# EAGLE board carret_actuator (EAGLE 5.11)
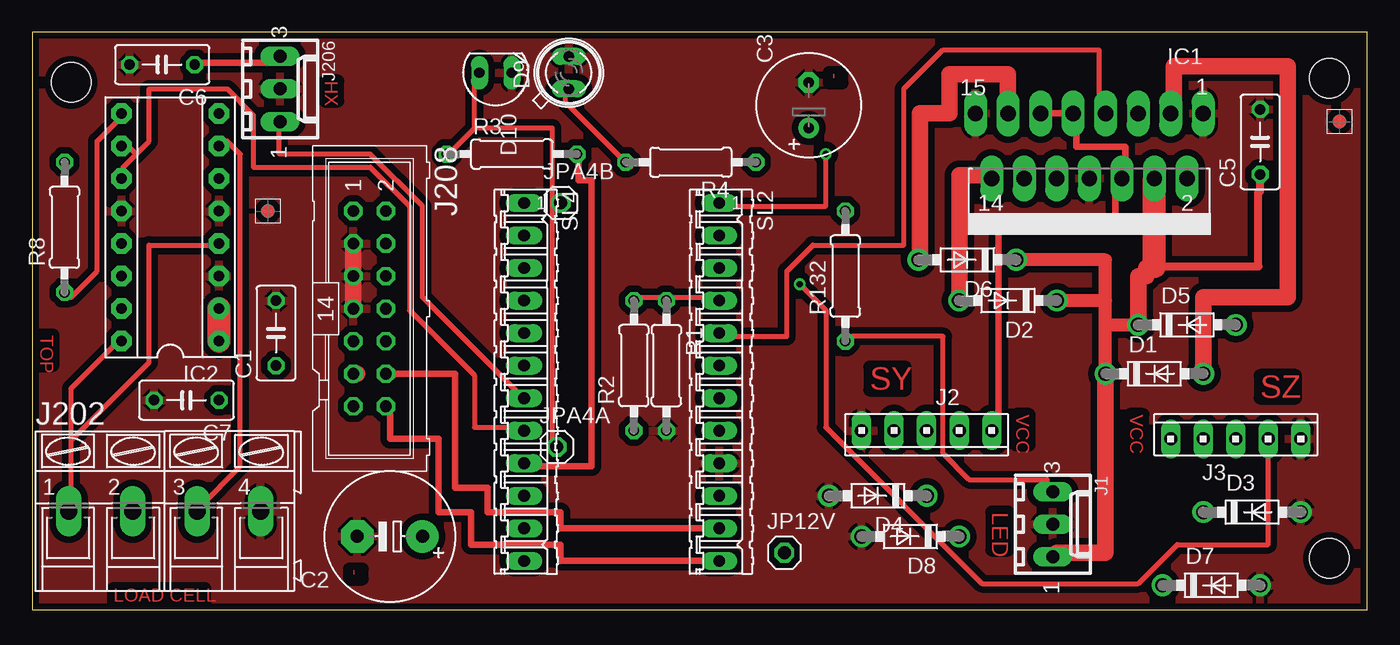
[diagram p0: board, top side]
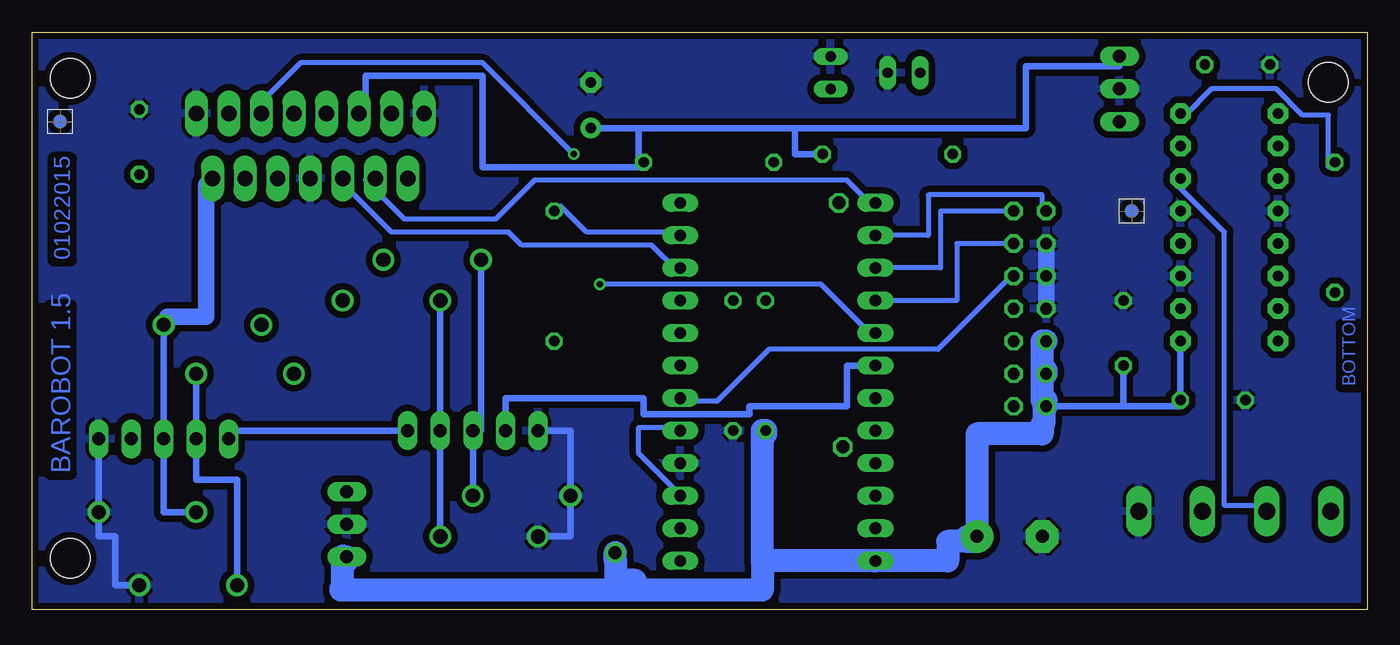
[diagram p1: board, bottom side, seen from below]

Size 104.27 x 45.09 mm. Coordinates in mm from the lower left corner, seen from the top.
Outline: 0,0 104.27,0 104.27,45.09 0,45.09 0,0
Copper layers (1*16): Top 0.035mm / dielectric 1.5mm / Bottom 0.035mm
Design rules "default *": minimum track width 10mil, minimum drill 0.5mm, track to track 10mil, track to pad 10mil, pad to pad 8mil, via to via 10mil, smd to smd 8mil, copper to edge 20mil, drill to drill 8mil, minimum pad ring 10mil, minimum via ring 8mil, stop-mask expansion 0mil, vias tented up to drill 0mil, thermal gap 10mil
Net classes: 0 default: width 0.381 mm, drill 0.254 mm, clearance 0.254 mm; 1 power12: width 1.778 mm; 2 ground: width 0.508 mm; 3 power5: width 0.508 mm; 4 power6: width 1.27 mm
Holes 3.1 mm at 101.3,41.47 3.05,41.15 101.3,4
vRestrict: area 20.3,32.4 to 58.4,45.1

## Footprints (pad centres in the part's own frame; a part is rotated, then mirrored left to right if it is on the bottom)
C050-030X075 = drill 0.813 octagon: 1 -2.54,0; 2 2.54,0
E5-10,5 = drill 1.016 pad 2.54 round: + -2.54,0 | drill 1.016 pad 2.54 octagon: - 2.54,0
E3,5-8 = drill 0.813 pad 1.6 round: + -1.778,0 | drill 0.813 pad 1.6 octagon: - 1.778,0
DO41-7.6 = drill 1.1 pad 1.7 round: A 3.81,0; C -3.81,0
SFH482 = drill 0.813 long: A -1.27,0; K 1.27,0
SFH205 = drill 0.813 long: A 0,-1.27; K 0,1.27
MULTIWATT-15 = drill 1.2 long: 1 -8.89,-7.62; 2 -7.62,-2.54; 3 -6.35,-7.62; 4 -5.08,-2.54; 5 -3.81,-7.62; 6 -2.54,-2.54; 7 -1.27,-7.62; 8 0,-2.54; 9 1.27,-7.62; 10 2.54,-2.54; 11 3.81,-7.62; 12 5.08,-2.54; 13 6.35,-7.62; 14 7.62,-2.54; 15 8.89,-7.62
DIL16 = drill 0.813 pad 1.6 octagon: 1 -8.89,-3.81; 2 -6.35,-3.81; 3 -3.81,-3.81; 4 -1.27,-3.81; 5 1.27,-3.81; 6 3.81,-3.81; 7 6.35,-3.81; 8 8.89,-3.81; 9 8.89,3.81; 10 6.35,3.81; 11 3.81,3.81; 12 1.27,3.81; 13 -1.27,3.81; 14 -3.81,3.81; 15 -6.35,3.81; 16 -8.89,3.81
6410-03 = drill 1.016 long: 1 2.54,0; 2 0,0; 3 -2.54,0
10X05MTA = drill 1.016 long: 1 5.08,0; 2 2.54,0; 3 0,0; 4 -2.54,0; 5 -5.08,0
AK300/4 = drill 1.321 long: 1 -7.493,0; 2 -2.515,0; 3 2.515,0; 4 7.493,0
ML14 = drill 0.914 octagon: 1 -7.62,-1.27; 2 -7.62,1.27; 3 -5.08,-1.27; 4 -5.08,1.27; 5 -2.54,-1.27; 6 -2.54,1.27; 7 0,-1.27; 8 0,1.27; 9 2.54,-1.27; 10 2.54,1.27; 11 5.08,-1.27; 12 5.08,1.27; 13 7.62,-1.27; 14 7.62,1.27
1X01 = drill 1.016 octagon: 1 0,0
0207/10 = drill 0.813 octagon: 1 -5.08,0; 2 5.08,0
12P = drill 0.914 long: 1 -13.97,0; 2 -11.43,0; 3 -8.89,0; 4 -6.35,0; 5 -3.81,0; 6 -1.27,0; 7 1.27,0; 8 3.81,0; 9 6.35,0; 10 8.89,0; 11 11.43,0; 12 13.97,0

## Placement (x,y rotation side)
C1  100nF  [C050-030X075]  19.05,21.59 90 top
C2  1000uF  [E5-10,5]  27.94,5.71 180 top
C3  100uF  [E3,5-8]  60.64,39.37 90 top
C5  100nF  [C050-030X075]  95.89,36.51 90 top
C6  100nF  [C050-030X075]  10.16,42.55 180 top
C7  100nF  [C050-030X075]  12.06,16.35 180 top
D1  1N5819-T  [DO41-7.6]  87.63,18.41 0 top
D2  1N5819-T  [DO41-7.6]  76.2,24.13 180 top
D3  1N5819-T  [DO41-7.6]  95.25,7.62 0 top
D4  1N5819-T  [DO41-7.6]  66.04,8.89 180 top
D5  1N5819-T  [DO41-7.6]  90.17,22.23 0 top
D6  1N5819-T  [DO41-7.6]  73.03,27.3 180 top
D7  1N5819-T  [DO41-7.6]  92.08,1.91 0 top
D8  1N5819-T  [DO41-7.6]  68.58,5.71 180 top
D9  SFH482  [SFH482]  41.91,41.91 90 top
D10  SFH205  [SFH205]  36.2,41.91 270 top
IC1  L298  [MULTIWATT-15]  82.55,31.11 180 top
IC2  INA125P  [DIL16]  10.79,29.84 90 top
J1  WF03S-LF  [6410-03]  79.69,6.67 270 top
J2  [10X05MTA]  69.85,13.97 180 top
J3  [10X05MTA]  93.98,13.34 0 top
J202  [AK300/4]  10.37,7.68 0 top
J206  WF03S-LF  [6410-03]  19.37,40.64 270 top
J208  BH14S  [ML14]  26.35,23.5 270 top
JP12V  [1X01]  58.74,4.45 0 top
JPA4A  [1X01]  40.96,12.7 0 top
JPA4B  [1X01]  41.27,31.75 0 top
R1  150k  [0207/10]  49.53,19.05 270 top
R2  220k  [0207/10]  46.99,19.05 90 top
R3  150k  [0207/10]  37.47,35.56 0 top
R4  150k  [0207/10]  51.44,34.92 180 top
R8  1k  [0207/10]  2.54,29.84 90 top
R132  240  [0207/10]  63.5,26.04 90 top
SL2  [12P]  53.66,17.78 270 top
SL4  [12P]  38.42,17.78 270 top
U$1  [FIDUCIAL_G10S]  18.41,31.11 0 top
U$2  [FIDUCIAL_G10S]  102.08,38.1 0 top
U$3  [FIDUCIAL_G10S]  102.08,38.1 0 bottom
U$4  [FIDUCIAL_G10S]  18.41,31.11 0 bottom

## Library data of the parts
C1 C5-C7 = resistor
C2 C3 R1-R4 R8 R132 = rcl
D1-D8 = diode
D9 = led
D10 = opto-trans-siemens; OC_FARNELL: unknown; OC_NEWARK: unknown
IC1 = st-microelectronics; MPN: L298N; OC_FARNELL: 1589425; OC_NEWARK: 32M1527
IC2 = burr-brown; MF: TEXAS INSTRUMENT CONNECTORS; MPN: INA125P; OC_FARNELL: 1459461; OC_NEWARK: 35C1726
J1 J206 = con-molex; OC_FARNELL: unknown; OC_NEWARK: unknown
J2 J3 = con-amp; OC_FARNELL: unknown; OC_NEWARK: unknown
J202 = con-ptr500; OC_FARNELL: unknown; OC_NEWARK: unknown
J208 = con-ml; OC_FARNELL: unknown; OC_NEWARK: unknown
JP12V JPA4A JPA4B = pinhead
SL2 SL4 = con-amp-quick; OC_FARNELL: unknown; OC_NEWARK: unknown
U$1-U$4 = dicons

## Nets
+12V [power12]: C1.1 C2.+ C5.1 C7.1 D1.C D2.C D5.C D6.C IC1.4 IC2.1 IC2.2 J1.1 J208.9 J208.11 J208.13 JP12V.1 R2.1 SL4.12
GND [ground]: C1.2 C2.- C3.- C5.2 C6.2 C7.2 D3.A D4.A D7.A D8.A D9.K D10.K IC1.1 IC1.8 IC1.15 IC2.3 IC2.5 IC2.12 J1.2 J2.1 J3.1 J202.4 J206.2 J208.3 J208.5 J208.7 R1.2 SL2.9
N$1: J1.3 R132.1
N$2: J208.14 SL2.12
N$3: R132.2 SL2.2
N$4: IC1.10 SL2.3
N$5: J206.1 SL4.7
N$6: J208.1 SL4.2
N$7: J208.12 SL2.11
N$8: J208.2 SL4.3
N$9: J208.10
N$10: IC1.12 SL4.1
N$11: J208.8
N$12: J208.4 SL4.4
N$13: IC2.6 J202.2
N$14: D9.A R4.2
N$15: SL2.8 SL2.10
N$16: J3.2 SL4.5
N$17 [power6]: D2.A D8.C IC1.14 J2.4
N$18: R1.1 R2.2 SL2.4
N$19: IC1.7 SL2.5
N$20 [power6]: D4.C D6.A IC1.13 J2.3
N$21: IC1.5 SL2.1
N$22 [power6]: D1.A D7.C IC1.3 J3.4
N$23 [power6]: D3.C D5.A IC1.2 J3.3
N$25: IC2.4 IC2.16 J202.1
N$26: IC2.7 J202.3
N$27: J208.6 SL2.7
N$28: J2.2 SL4.6
N$29: D10.A JPA4A.1 JPA4B.1 R3.1
N$30: IC2.8 R8.2
N$31: IC2.9 R8.1
N$41: IC2.10 IC2.11 SL4.8
VCC [power5]: C3.+ C6.1 IC1.6 IC1.9 IC1.11 J2.5 J3.5 J206.3 R3.2 R4.1 SL4.9

## Tracks (layer width: path | path; a pad name or v marks a point on that pad's centre or on a via)
+12V
  Top 0.61: C5.1 95.89,32.64 95.76,32.64 95.76,26.8 87.63,26.8
  Top 1.016: 83.82,22.23 D5.C | 83.82,22.23 83.82,24.13 | 83.82,24.13 83.82,27.3 D6.C | 83.82,24.13 D2.C | D1.C 83.82,22.23
  Top 1.27: 25.08,18.29 J208.11 25.4,18.41 | D1.C 83.82,4.45 80.01,4.45 80.01,4.13 J1.1 | D5.C 86.36,26.04 87,26.04 87,26.67 87.63,26.67 87.63,26.8
  Top 1.778: IC2.1 IC2.2 | 87.63,26.8 IC1.4
  Bottom 0.508: 19.05,15.88 14.61,15.88 C7.1 IC2.1 | 19.05,15.88 J208.13 | 19.05,15.88 C1.1
  Bottom 1.778: J208.9 25.4,20.95 25.4,18.67 25.08,18.67 J208.11 25.4,18.41 25.4,16.38 25.08,16.38 25.08,16 | 25.08,16 25.27,16 25.27,14.48 25.4,14.48 25.4,13.72 30.48,13.72 C2.+ 31.24,5.71 31.24,5.33 | J208.13 25.08,16 | 31.24,5.33 30.86,5.33 | 31.24,5.33 32.77,5.33 32.77,3.81 SL4.12 47.24,3.81 | 47.24,3.81 47.24,1.52 57.15,1.52 | 47.24,3.81 47.24,13.72 | 47.24,13.72 47.24,13.97 | 57.15,1.52 80.14,1.52 80.14,1.65 80.01,1.65 80.01,3.81 | 80.01,3.81 79.69,3.81 J1.1 | 80.01,3.81 80.01,4.19 | 47.24,13.72 46.99,13.72 R2.1 | JP12V.1 58.74,3.81 58.67,3.81 58.67,2.29 57.15,2.29 57.15,1.52
GND
  Top 1.27: J208.7 J208.3
  Bottom 0.508: J3.1 D3.A 99.06,5.71 97.79,5.71 97.79,1.91 D7.A | D4.A 62.23,13.97 J2.1 | D8.A 62.23,5.71 62.23,8.26
  Bottom 1.27: J208.7 J208.5 J208.3
  pour Top (isolate 0.508, rank 3): 0,45.09 104.14,45.09 104.14,0 0,0
  pour Bottom (isolate 0.508): 0,45.09 104.14,45.09 104.27,0 0,0
N$1
  Top 0.381: R132.1 64.01,21.34 71.12,21.34 71.12,12.19 73.15,10.16 79.25,10.16 79.25,9.14 J1.3
N$2
  Top 0.508: SL2.12 41.27,3.81 41.27,5.08 34.29,5.08 34.29,7.62 31.75,7.62 31.75,13.34 27.94,13.34 27.94,15.88 J208.14
N$3
  Bottom 0.381: R132.2 62.99,31.5 60.96,29.46 53.85,29.46 SL2.2
N$4
  Bottom 0.381: SL2.3 53.85,26.42 55.88,28.45 66.04,28.45 67.06,29.46 76.2,29.46 80.26,33.53 IC1.10
N$5
  Top 0.381: SL4.7 38.61,16.26 30.48,24.38 30.48,31.5 26.42,35.56 19.3,35.56 19.3,37.59 J206.1
N$6
  Bottom 0.406: SL4.2 34.29,29.21 34.29,32.38 25.4,32.38 25.4,31.11 J208.1
N$7
  Top 0.508: SL2.11 41.27,6.35 41.27,7.62 35.56,7.62 35.56,9.53 33.02,9.53 33.02,18.41 J208.12
N$8
  Bottom 0.406: J208.2 33.34,31.11 33.34,26.67 SL4.3
N$10
  Bottom 0.381: SL4.1 38.61,31.5 40.64,33.53 65.02,33.53 68.07,30.48 75.18,30.48 78.23,33.53 IC1.12
N$12
  Bottom 0.406: J208.4 32.07,28.57 32.07,24.13 SL4.4
N$13
  Bottom 0.381: IC2.6 15.24,33.53 11.18,29.46 11.18,8.13 8.13,8.13 J202.2
N$14
  Top 0.381: 46.74,34.54 R4.2 41.66,39.62 41.66,40.64 D9.A
N$15
  Bottom 0.381: SL2.10 53.85,9.14 56.9,12.19 56.9,14.22 53.85,14.22 SL2.8
N$16  (via drill 0.5)
  Top 0.381: v59.94,25.4 61.98,23.37 61.98,14.22 74.17,2.03 86.36,2.03 89.41,5.08 96.52,5.08 J3.2
  Bottom 0.381: v59.94,25.4 42.67,25.4 38.61,21.34 SL4.5
N$17
  Top 1.27: IC1.14 74.93,33.91 72.39,33.91 D2.A
  Bottom 0.508: D2.A J2.4 D8.C
N$18
  Top 0.381: 49.78,24.38 46.74,24.38 R2.2 | 49.78,24.38 52.83,24.38 SL2.4 | 49.78,24.38 R1.1
N$19
  Top 0.381: SL2.5 53.85,21.34 58.93,21.34 58.93,26.42 60.96,28.45 68.07,28.45 68.07,40.64 71.12,43.69 83.31,43.69 83.31,39.62 IC1.7
N$20
  Top 1.27: D4.C 69.98,8.89 | 69.34,27.43 69.34,27.3 | 69.34,27.43 69.34,38.73 71.63,38.73 71.63,41.78 76.2,41.78 IC1.13 | 69.34,27.43 69.09,27.43 69.09,27.3 D6.A
  Bottom 0.508: D6.A 69.22,13.97 J2.3 D4.C
N$21  (via drill 0.5)
  Top 0.381: v61.98,35.56 61.98,31.5 53.85,31.5 SL2.1
  Bottom 0.381: v61.98,35.56 69.09,42.67 83.31,42.67 86.36,39.62 IC1.5
N$22
  Top 1.27: IC1.3 88.9,39.24 89.15,39.24 89.15,42.42 98.04,42.42 98.04,24.38 91.44,24.38 D1.A
  Bottom 0.508: D1.A J3.4 91.44,10.16 88.27,10.16 D7.C
N$23
  Bottom 0.508: D5.A J3.3 93.98,7.62 D3.C
  Bottom 1.27: IC1.2 90.17,33.15 90.68,33.15 90.68,22.86 93.73,22.86 93.73,22.23 D5.A
N$25
  Top 0.381: 3.05,13.21 3.05,8.13 J202.1 | 3.05,13.21 3.05,17.27 7.11,21.34 IC2.16 | 3.05,13.21 9.14,19.3 9.14,28.45 14.22,28.45 IC2.4
N$26
  Top 0.381: IC2.7 15.24,36.58 16.26,35.56 16.26,11.18 13.21,8.13 J202.3
N$27
  Bottom 0.381: J208.6 27.43,26.42 33.53,20.32 46.74,20.32 50.8,16.26 52.83,16.26 SL2.7
N$28
  Bottom 0.508: J2.2 67.31,16.51 56.52,16.51 56.52,15.24 48.26,15.24 48.26,15.88 40.64,15.88 40.64,19.05 SL4.6
N$29
  Top 0.381: 34.54,37.59 32.51,35.56 R3.1 | 34.54,37.59 34.54,41.66 D10.A | 40.64,31.5 40.64,13.21 JPA4A.1 | 34.54,37.59 40.64,37.59 40.64,31.5 | 40.64,31.5 JPA4B.1
N$30
  Bottom 0.381: R8.2 3.05,34.54 3.05,38.61 5.08,38.61 7.11,40.64 12.19,40.64 14.22,38.61 IC2.8
N$31
  Top 0.381: R8.1 3.05,24.38 5.08,26.42 5.08,36.58 7.11,38.61 IC2.9
N$41
  Top 0.381: 8.13,35.56 7.11,34.54 7.11,33.53 IC2.11 | 8.13,35.56 9.14,36.58 9.14,40.64 15.24,40.64 17.27,38.61 17.27,34.54 26.42,34.54 29.46,31.5 29.46,23.37 34.54,18.29 34.54,14.22 37.59,14.22 SL4.8 | 8.13,35.56 7.11,36.58 IC2.10
VCC
  Top 0.508: IC1.11 IC1.9 81.53,38.73 81.53,36.13 85.34,36.13 85.34,33.91 85.09,33.91 IC1.6 84.58,33.66 84.58,30.1 75.44,30.1 75.44,14.48 74.93,14.48 J2.5 | SL4.9 38.61,11.43 38.61,11.18 43.69,11.18 43.69,33.53 42.67,33.53 42.67,35.56 R3.2 | C6.1 12.7,42.67 19.3,42.67 19.3,43.18 J206.3
  Bottom 0.508: J2.5 88.9,13.97 J3.5 | IC1.11 78.74,39.62 78.23,39.62 78.23,41.66 69.09,41.66 69.09,34.54 56.9,34.54 56.9,34.92 | 44.7,37.59 44.7,35.56 R3.2 | 44.7,37.59 56.9,37.59 | 56.9,37.59 C3.+ | 44.7,37.59 26.67,37.59 26.67,42.42 19.37,42.42 J206.3 | 56.9,37.59 56.9,34.92 | 56.9,34.92 R4.1

## Text on the board
Top: 1 | - | HX | TOP | SY | SZ | VCC | VCC | LED | - | LOAD CELL
Bottom: 01022015 | BOTTOM | BAROBOT 1.5